# Altium PCB Master Schematic.PcbDoc
Units mil, origin at the board's own origin, x right, y up, seen from the top; angles counter-clockwise.
Board outline 6000 x 4000 mil, 2 copper layers (Top Layer, Bottom Layer); 5 components, 6 nets, 152 pads, 0 vias.
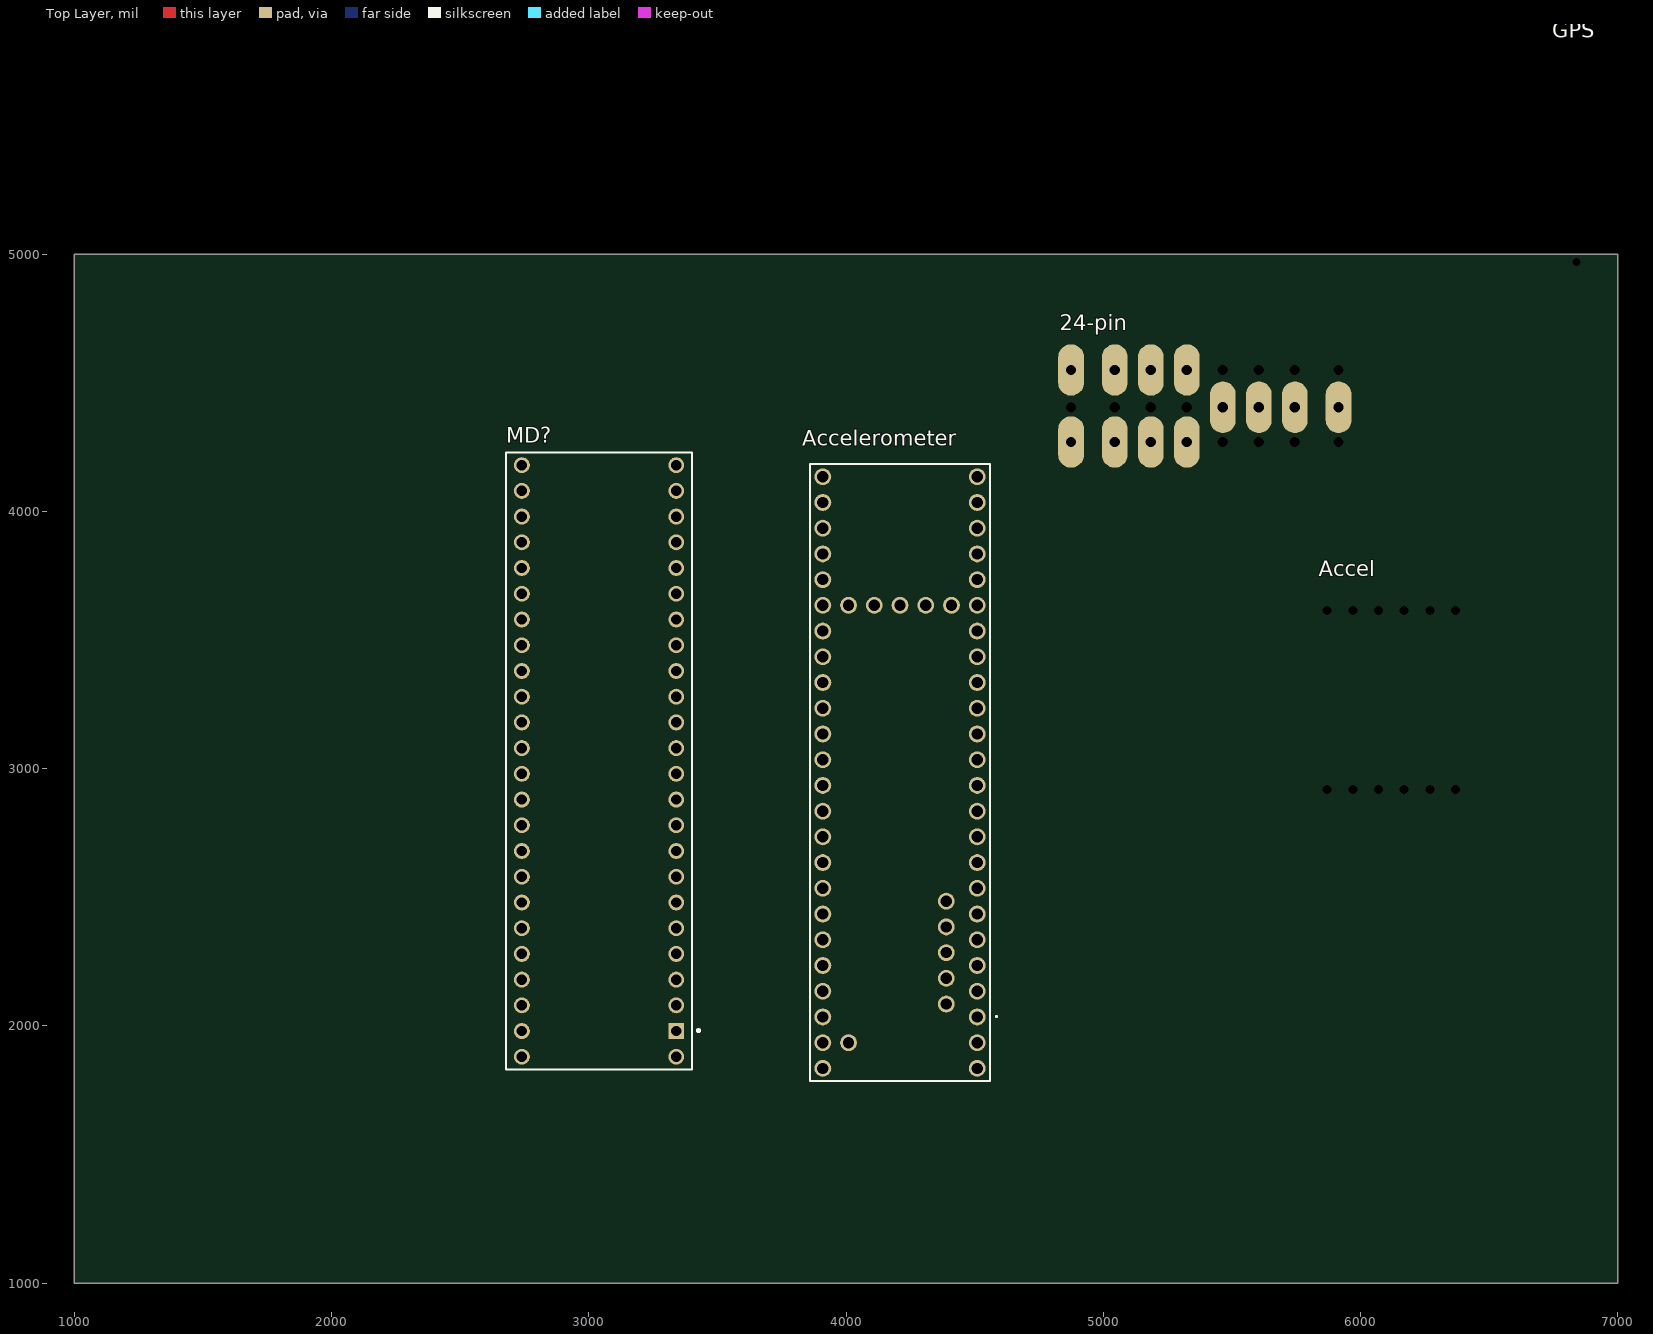
[diagram p0: Top Layer view]
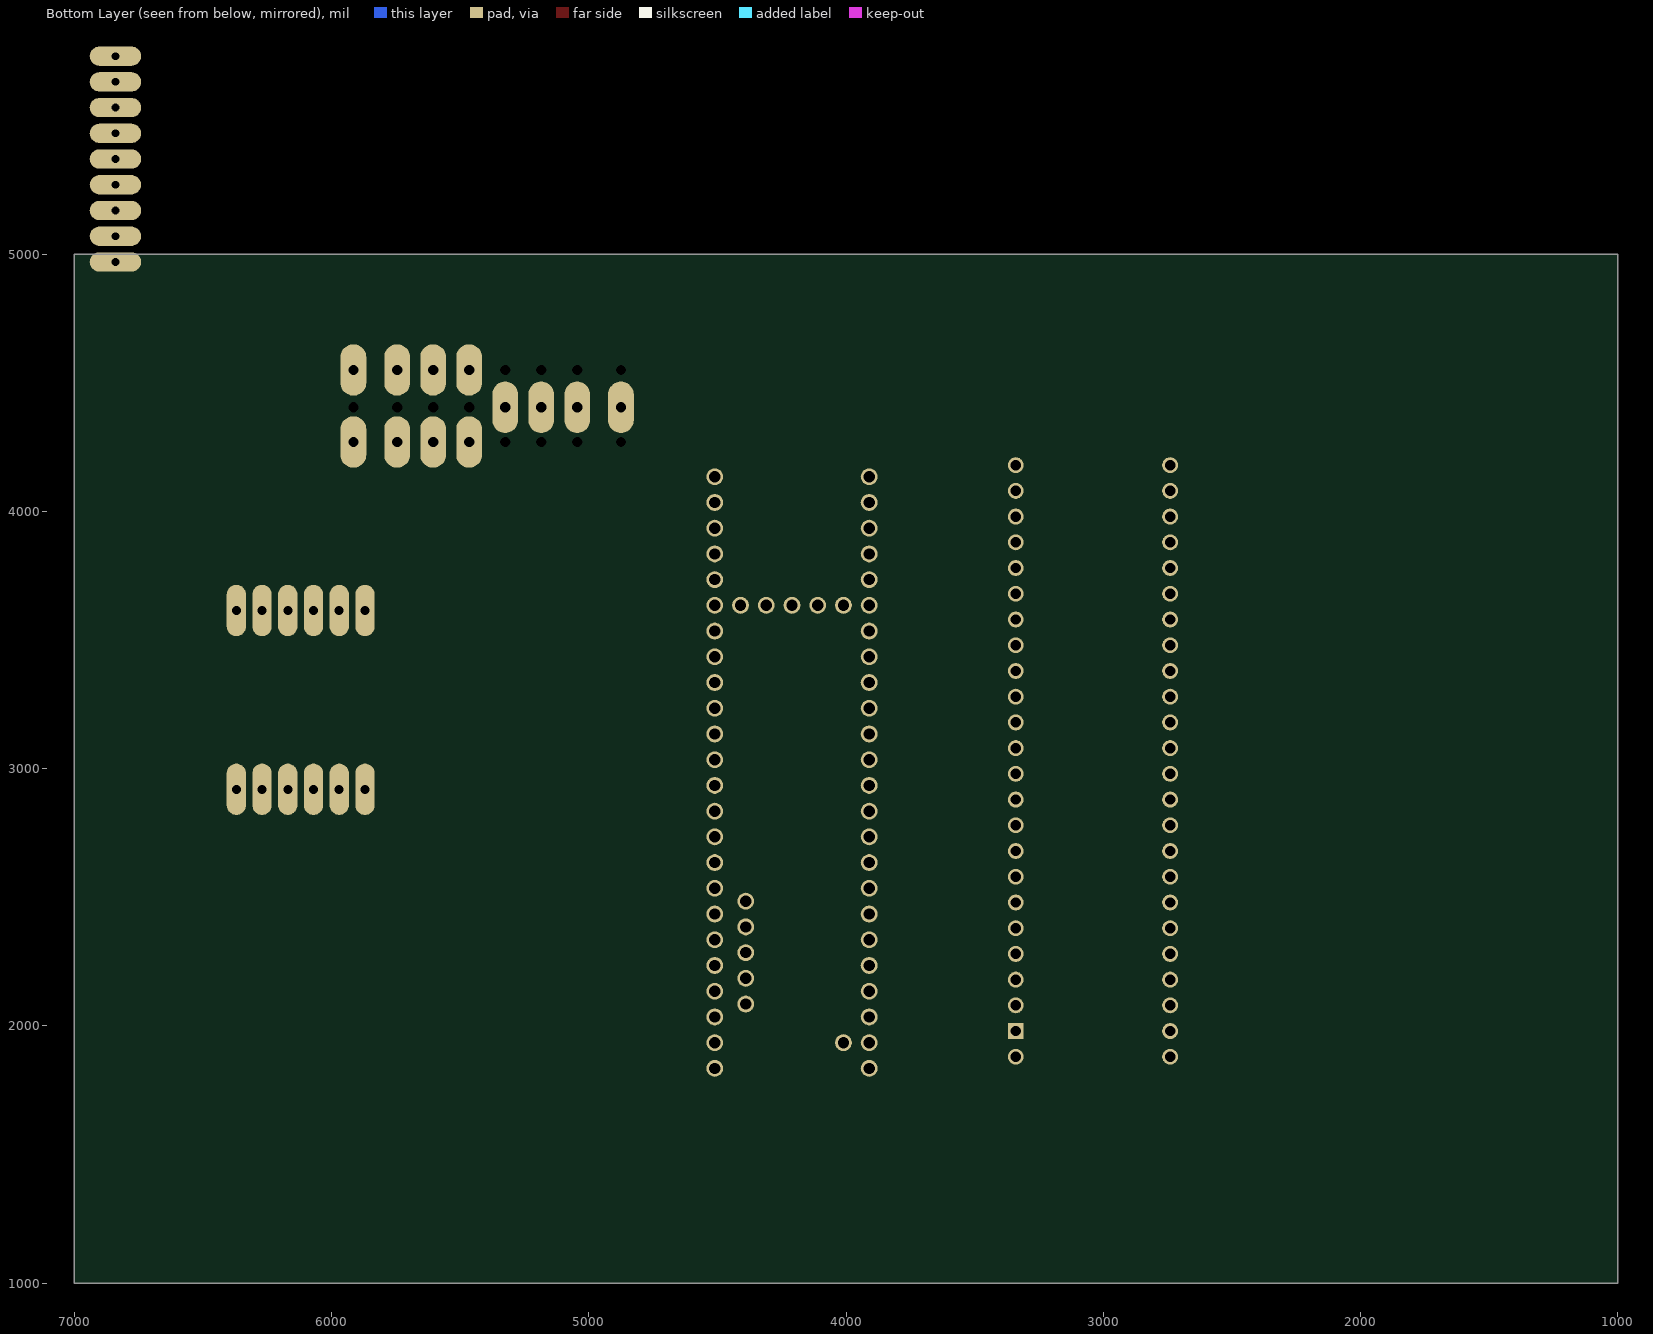
[diagram p1: Bottom Layer view, seen from below]

## Layer stack, top to bottom
Top Solder: solder mask 0.4, Solder Resist, Dk 3.5
Top Layer: signal copper 1.4
Dielectric 1: dielectric 12.6, FR-4, Dk 4.8
Bottom Layer: signal copper 1.4
Bottom Solder: solder mask 0.4, Solder Resist, Dk 3.5

## Board outline
1000,1000 7000,1000 7000,5000 1000,5000

## Design rules (kind name [scope] priority, off if disabled: settings)
Clearance [All] p1: gap=10 ignorepadtopadclearanceinfootprint=FALSE
PolygonConnect [All] p1: connectstyle=Relief reliefconductorwidth=10 reliefentries=4 polygonreliefangle="90 Angle" airgapwidth=10
RoutingVias [All] p1: holewidth=28 width=50 viastyle="Through Hole" minholewidth=28 minwidth=50 maxholewidth=28 maxwidth=50
SolderMaskExpansion [All] p1: expansion=4 istentingtop=FALSE
Width [All] p1: maxlimit=10 minlimit=10 preferedwidth=10
30 further rules are at their usual default settings.

## Classes and differential pairs
component class "Test Fit Schematic": 24-pin Accel GPS
component class "Master Schematic": Accelerometer MD?

## Components (designator, comment, footprint, x,y, rotation, side; value= is the part's Value field where it differs from the comment)
24-pin "DJ7242" DJ7242-Footprint-1 4875,4195 r0 top
Accel "Accelerometer Header" "Accelerometer Header-Footprint-1" 5870,2825 r0 top
Accelerometer "TEENSY_4.1" TEENSY41 4510,2035 r90 top
GPS "GPS" GPS-Footprint-1 6985,4925 r90 top
MD? "DEV-16996" FP-DEV-16996-MFG 3040,3030 r90 top

## Footprints (in the part's own frame and the unit in brackets; to place one, negate y for a bottom-side part, rotate by r counter-clockwise, add the part's x,y. Pads: shape width x height; smd on the part's side, far side on the other; paste and mask are expansions set on the pad)
"Accelerometer Header-Footprint-1" [mil]
  round 0 / inner round 60 / far side oval 75x200 hole 35: 1(0,95) 2(100,95) 3(200,95) 4(300,95) 5(400,95) 6(500,95) 7(0,790) 8(100,790) 9(200,790) 10(300,790) 11(400,790) 12(500,790)
DJ7242-Footprint-1 [mil]
  oval 100x200 / inner round 60 / far side round 0 hole 40: 1(0,355) 2(170,355) 3(310,355) 4(450,355) 13(590,210) 14(730,210) 15(870,210) 16(1040,210) 17(0,75) 18(170,75) 19(310,75) 20(450,75)
  round 0 / inner round 60 / far side oval 100x200 hole 40: 5(590,355) 6(730,355) 7(870,355) 8(1040,355) 9(0,210) 10(170,210) 11(310,210) 12(450,210) 21(590,75) 22(730,75) 23(870,75) 24(1040,75)
FP-DEV-16996-MFG [mm]
  rect 1.57x1.57 hole 1.02 paste-2539.97 mask+0: 0(-26.67,-7.62)
  round 1.57 hole 1.02 paste-2539.97 mask+0: 1(-24.13,-7.62) 2(-21.59,-7.62) 3(-19.05,-7.62) 4(-16.51,-7.62) 5(-13.97,-7.62) 6(-11.43,-7.62) 7(-8.89,-7.62) 8(-6.35,-7.62) 9(-3.81,-7.62) 10(-1.27,-7.62) 11(1.27,-7.62) 12(3.81,-7.62) 13(3.81,7.62) 14(1.27,7.62) 15(-1.27,7.62) 16(-3.81,7.62) 17(-6.35,7.62) 18(-8.89,7.62) 19(-11.43,7.62) 20(-13.97,7.62) 21(-16.51,7.62) 22(-19.05,7.62) 23(-21.59,7.62) 24(8.89,-7.62) 25(11.43,-7.62) 26(13.97,-7.62) 27(16.51,-7.62) 28(19.05,-7.62) 29(21.59,-7.62) 30(24.13,-7.62) 31(26.67,-7.62) 32(29.21,-7.62) 33(29.21,7.62) 34(26.67,7.62) 35(24.13,7.62) 36(21.59,7.62) 37(19.05,7.62) 38(16.51,7.62) 39(13.97,7.62) 40(11.43,7.62) 41(8.89,7.62) 42(-29.21,7.62) 43(-26.67,7.62) 44(-24.13,7.62) 45(6.35,7.62) 46(-29.21,-7.62) 47(6.35,-7.62)
  silkscreen extent -30.48,-9.95 30.48,9.19, body extent -30.58,-9.29 30.58,9.29, height 0.25
GPS-Footprint-1 [mil]
  round 0 / inner round 60 / far side oval 75x200 hole 30: 1(45,145) 2(145,145) 3(245,145) 4(345,145) 5(445,145) 6(545,145) 7(645,145) 8(745,145) 9(845,145)
TEENSY41 [mm]
  round 1.665 hole 1.11: 1(0,0) 2(2.54,0) 3(5.08,0) 4(7.62,0) 5(10.16,0) 6(12.7,0) 7(15.24,0) 8(17.78,0) 9(20.32,0) 10(22.86,0) 11(25.4,0) 12(27.94,0) 13(27.94,15.24) 14(25.4,15.24) 15(22.86,15.24) 16(20.32,15.24) 17(17.78,15.24) 18(15.24,15.24) 19(12.7,15.24) 20(10.16,15.24) 21(7.62,15.24) 22(5.08,15.24) 23(2.54,15.24) 24(33.02,0) 25(35.56,0) 26(38.1,0) 27(40.64,0) 28(43.18,0) 29(45.72,0) 30(48.26,0) 31(50.8,0) 32(53.34,0) 33(53.34,15.24) 34(50.8,15.24) 35(48.26,15.24) 36(45.72,15.24) 37(43.18,15.24) 38(40.64,15.24) 39(38.1,15.24) 40(35.56,15.24) 41(33.02,15.24) 42(30.48,0) 43(40.64,2.54) 44(40.64,5.08) 45(40.64,7.62) 46(40.64,10.16) 47(40.64,12.7) 48(11.43,3.05) 49(8.89,3.05) 50(6.35,3.05) 51(3.81,3.05) 52(1.27,3.05) 53(0,15.24) 55(-5.08,15.24) 57(-2.54,0) 68(-2.54,12.7) 69(30.48,15.24) 70(-2.54,15.24) 71(-5.08,0)
  silkscreen extent -6.35,-1.95 54.61,16.51, body extent -7,-1.27 54.66,16.51, height 4.36

## Part data
24-pin: library part CMP-00030-00002-2, "24-pin connector"
Accel: library part CMP-002-00071-2, "Header for Adafruit Accelerometer"
Accelerometer: "Integrated Circuit", Manufacturer_Name=PJRC, Manufacturer_Part_Number="TEENSY 4.1", Datasheet Link=https://www.pjrc.com/store/teensy41.html
GPS: library part CMP-002-00072-1, "Adafruit GPS chip"
MD?: library part CMP-157412-000001-1, "TEENSY 4.1 (HEADERS)"

## Nets (pads, with @x,y where several pads share a name; then routed paths per layer and width w, separated by ;. In a path a pad name is that pad's centre, name@x,y a point inside that pad or via, vN(x,y) a via of type N, cw(c..) or ccw(c..) an arc to the next point about the centre after c; other vN are vias at no path point)
3.3V: Accelerometer.42
"BLPS Read": Accelerometer.15
"Coolant Read": Accelerometer.14
GND: Accelerometer.45
RX: Accelerometer.16
TX: Accelerometer.17
pads on no net: 24-pin.1 24-pin.2 24-pin.3 24-pin.4 24-pin.5 24-pin.6 24-pin.7 24-pin.8 24-pin.9 24-pin.10 24-pin.11 24-pin.12 24-pin.13 24-pin.14 24-pin.15 24-pin.16 24-pin.17 24-pin.18 24-pin.19 24-pin.20 24-pin.21 24-pin.22 24-pin.23 24-pin.24 Accel.1 Accel.2 Accel.3 Accel.4 Accel.5 Accel.6 Accel.7 Accel.8 Accel.9 Accel.10 Accel.11 Accel.12 Accelerometer.1 Accelerometer.2 Accelerometer.3 Accelerometer.4 Accelerometer.5 Accelerometer.6 Accelerometer.7 Accelerometer.8 Accelerometer.9 Accelerometer.10 Accelerometer.11 Accelerometer.12 Accelerometer.13 Accelerometer.18 Accelerometer.19 Accelerometer.20 Accelerometer.21 Accelerometer.22 Accelerometer.23 Accelerometer.24 Accelerometer.25 Accelerometer.26 Accelerometer.27 Accelerometer.28 Accelerometer.29 Accelerometer.30 Accelerometer.31 Accelerometer.32 Accelerometer.33 Accelerometer.34 Accelerometer.35 Accelerometer.36 Accelerometer.37 Accelerometer.38 Accelerometer.39 Accelerometer.40 Accelerometer.41 Accelerometer.43 Accelerometer.44 Accelerometer.46 Accelerometer.47 Accelerometer.48 Accelerometer.49 Accelerometer.50 Accelerometer.51 Accelerometer.52 Accelerometer.53 Accelerometer.55 Accelerometer.57 Accelerometer.68 Accelerometer.69 Accelerometer.70 Accelerometer.71 GPS.1 GPS.2 GPS.3 GPS.4 GPS.5 GPS.6 GPS.7 GPS.8 GPS.9 MD?.0 MD?.1 MD?.2 MD?.3 MD?.4 MD?.5 MD?.6 MD?.7 MD?.8 MD?.9 MD?.10 MD?.11 MD?.12 MD?.13 MD?.14 MD?.15 MD?.16 MD?.17 MD?.18 MD?.19 MD?.20 MD?.21 MD?.22 MD?.23 MD?.24 MD?.25 MD?.26 MD?.27 MD?.28 MD?.29 MD?.30 MD?.31 MD?.32 MD?.33 MD?.34 MD?.35 MD?.36 MD?.37 MD?.38 MD?.39 MD?.40 MD?.41 MD?.42 MD?.43 MD?.44 MD?.45 MD?.46 MD?.47